# Altium PCB PCB1.PcbDoc
Units mil, origin at the board's own origin, x right, y up, seen from the top; angles counter-clockwise.
Board outline 1695 x 2187 mil, 4 copper layers (SignalTop, Ground, Power, SingalBottom), stack 62.047 mil thick; 65 components, 56 nets, 231 pads, 113 vias.
Unrouted connection lines stored in the file: 4.
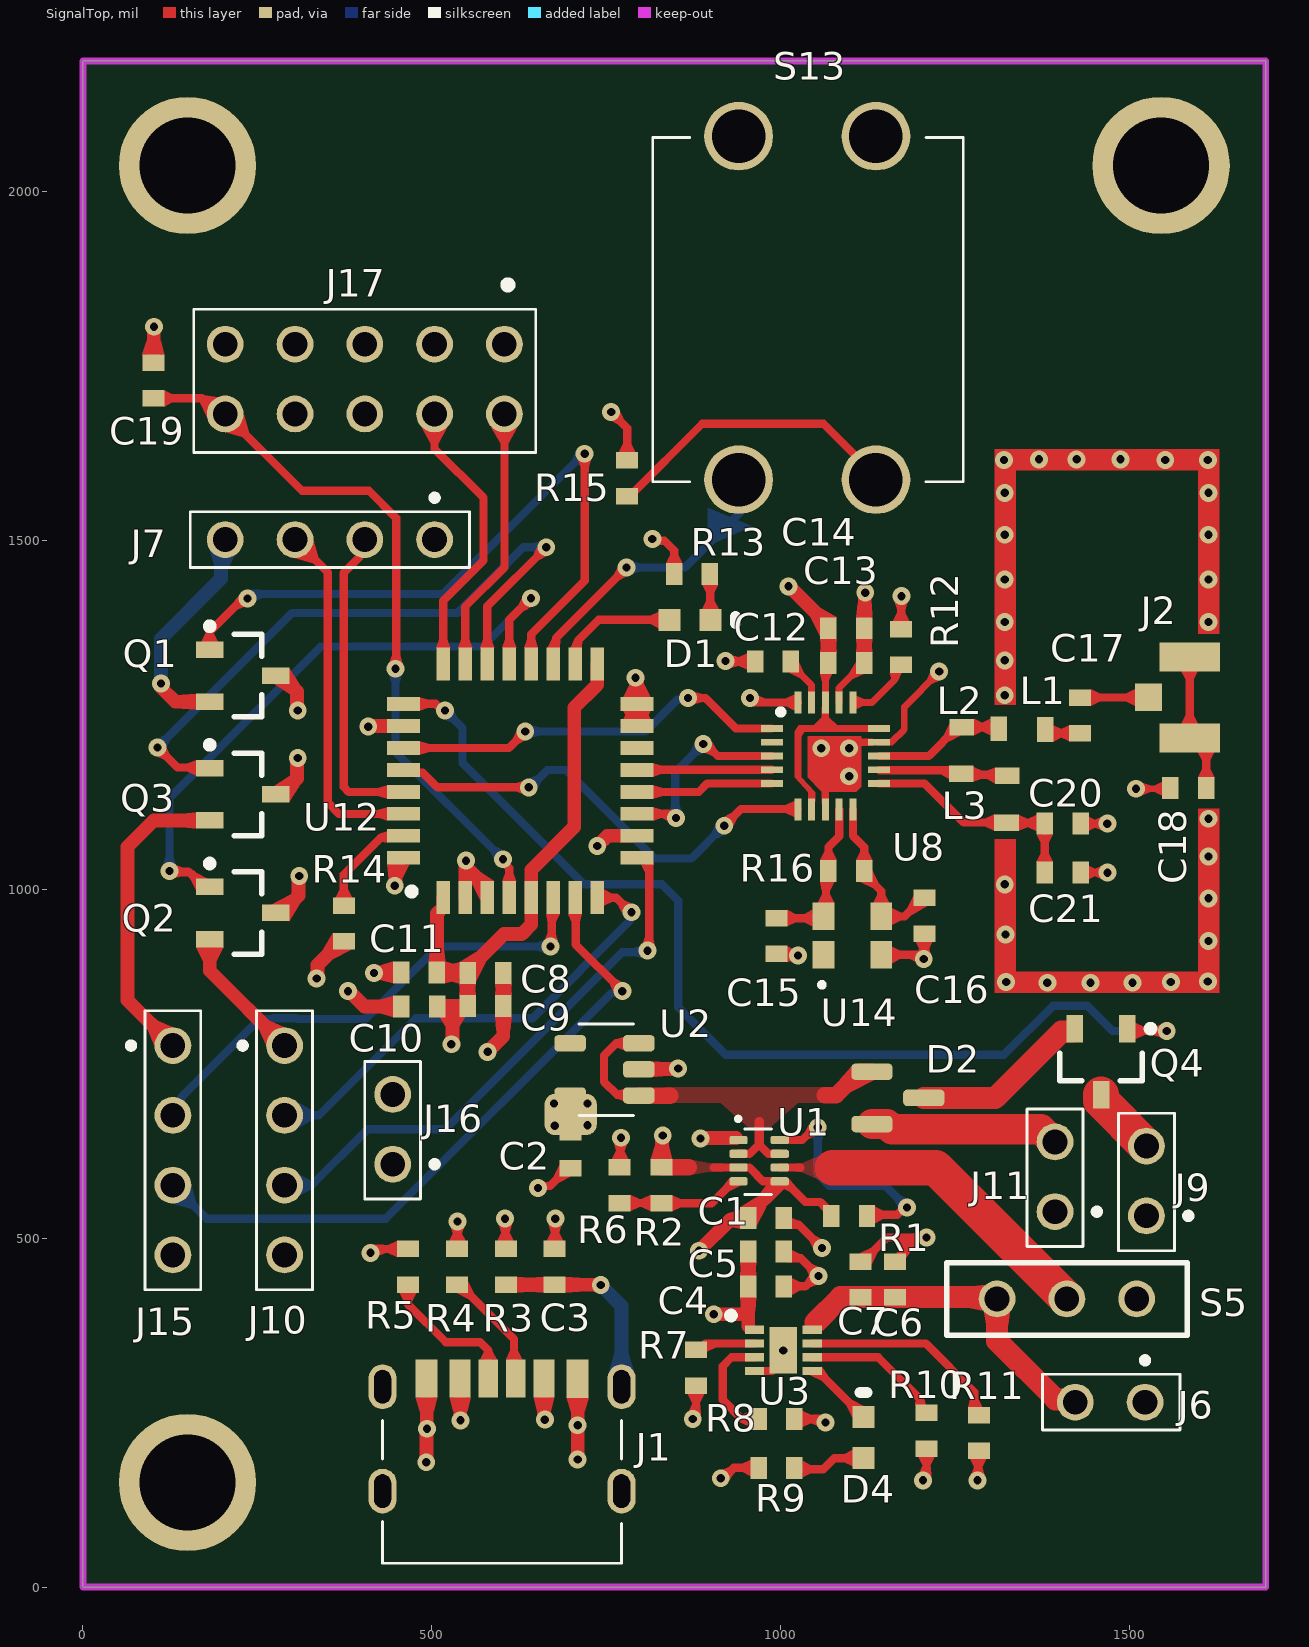
[diagram p0: SignalTop view]
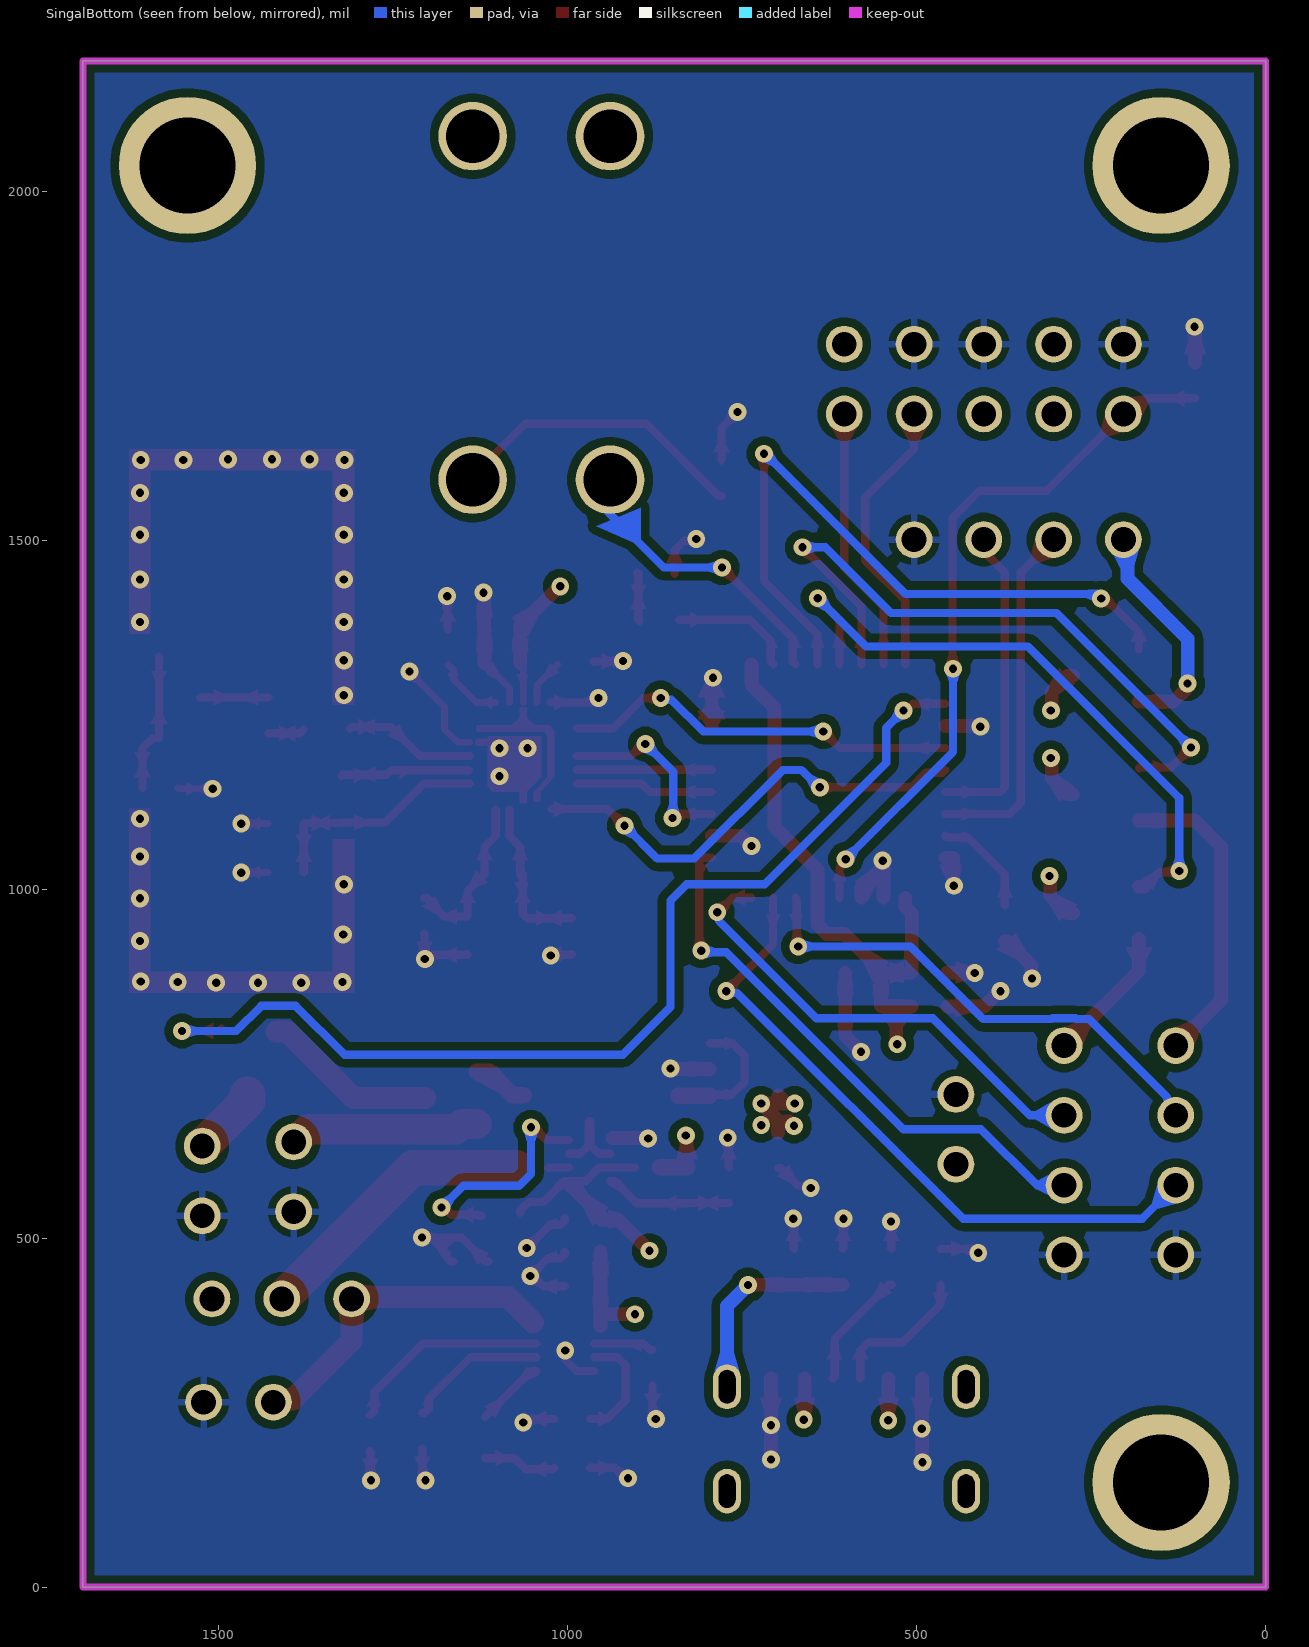
[diagram p1: SingalBottom view, seen from below]
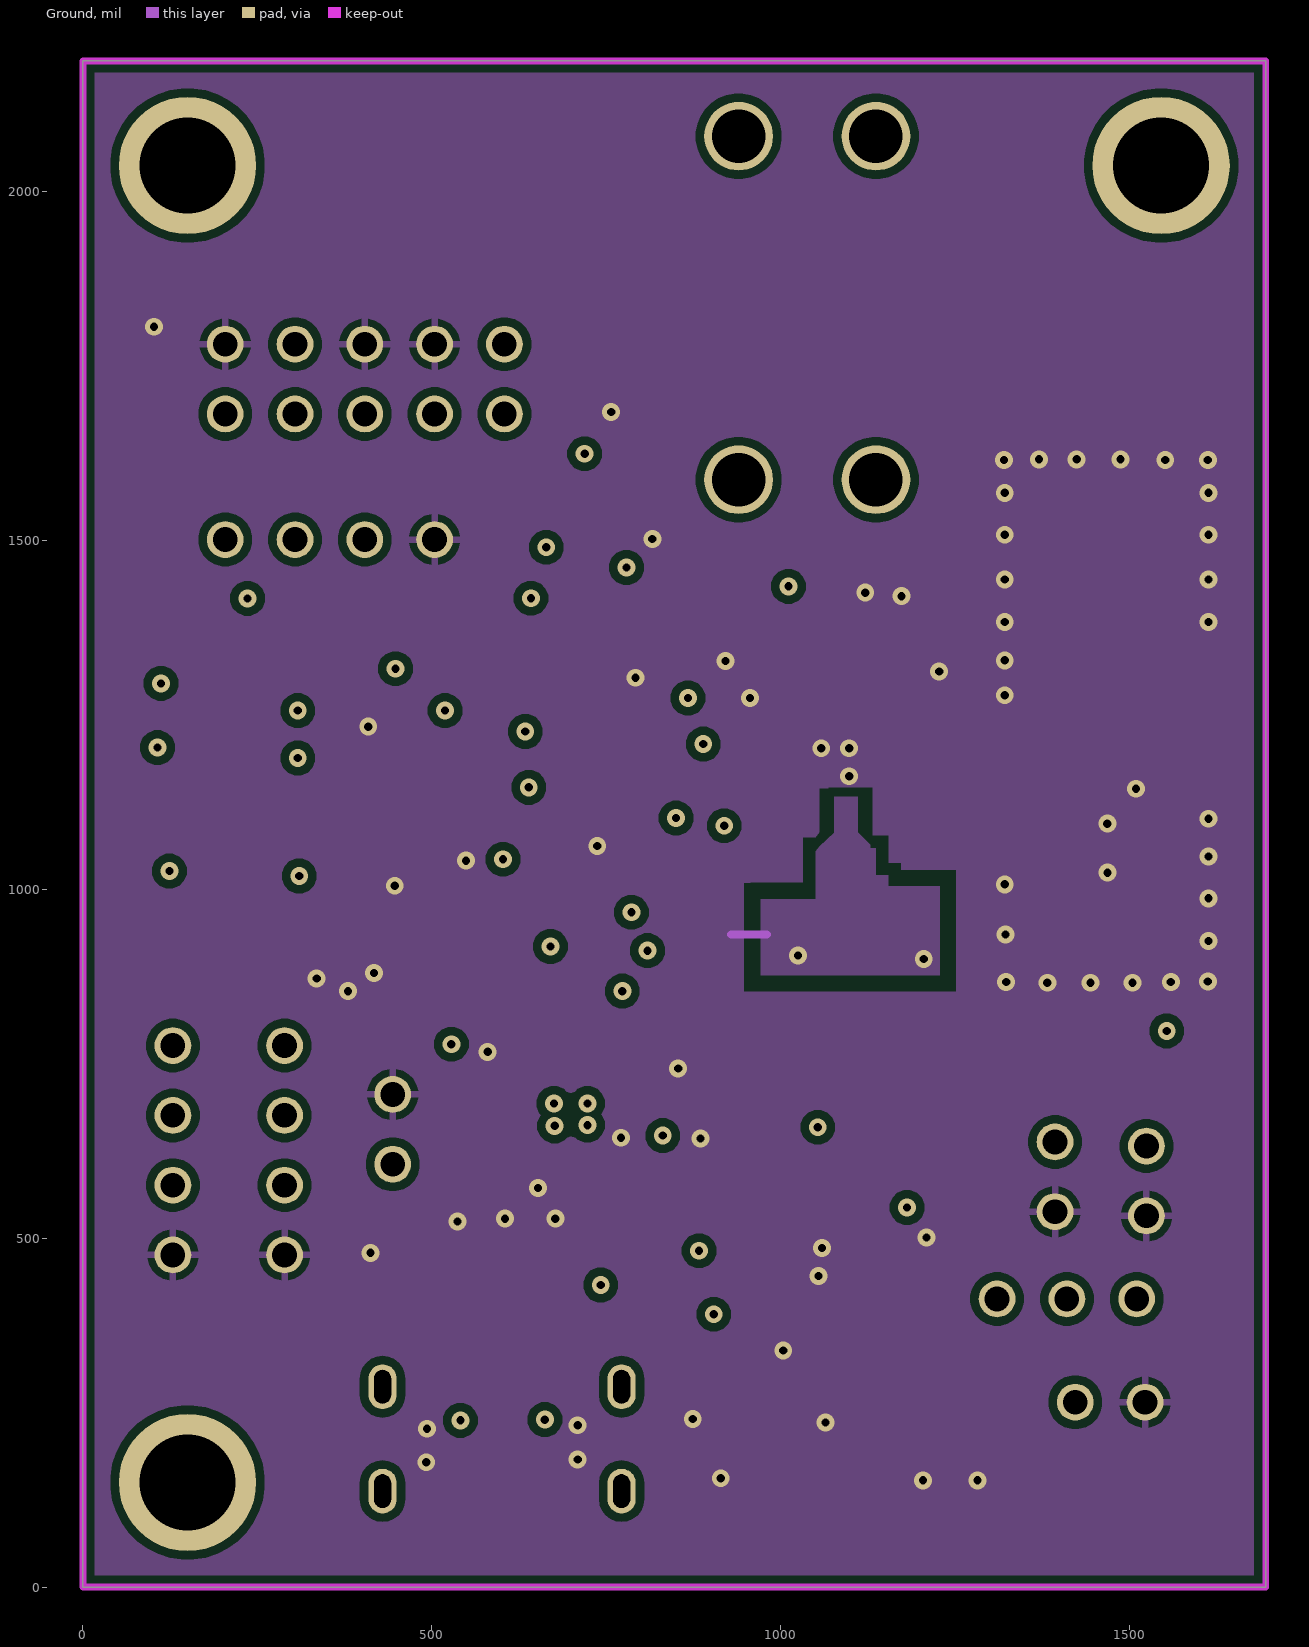
[diagram p2: Ground]
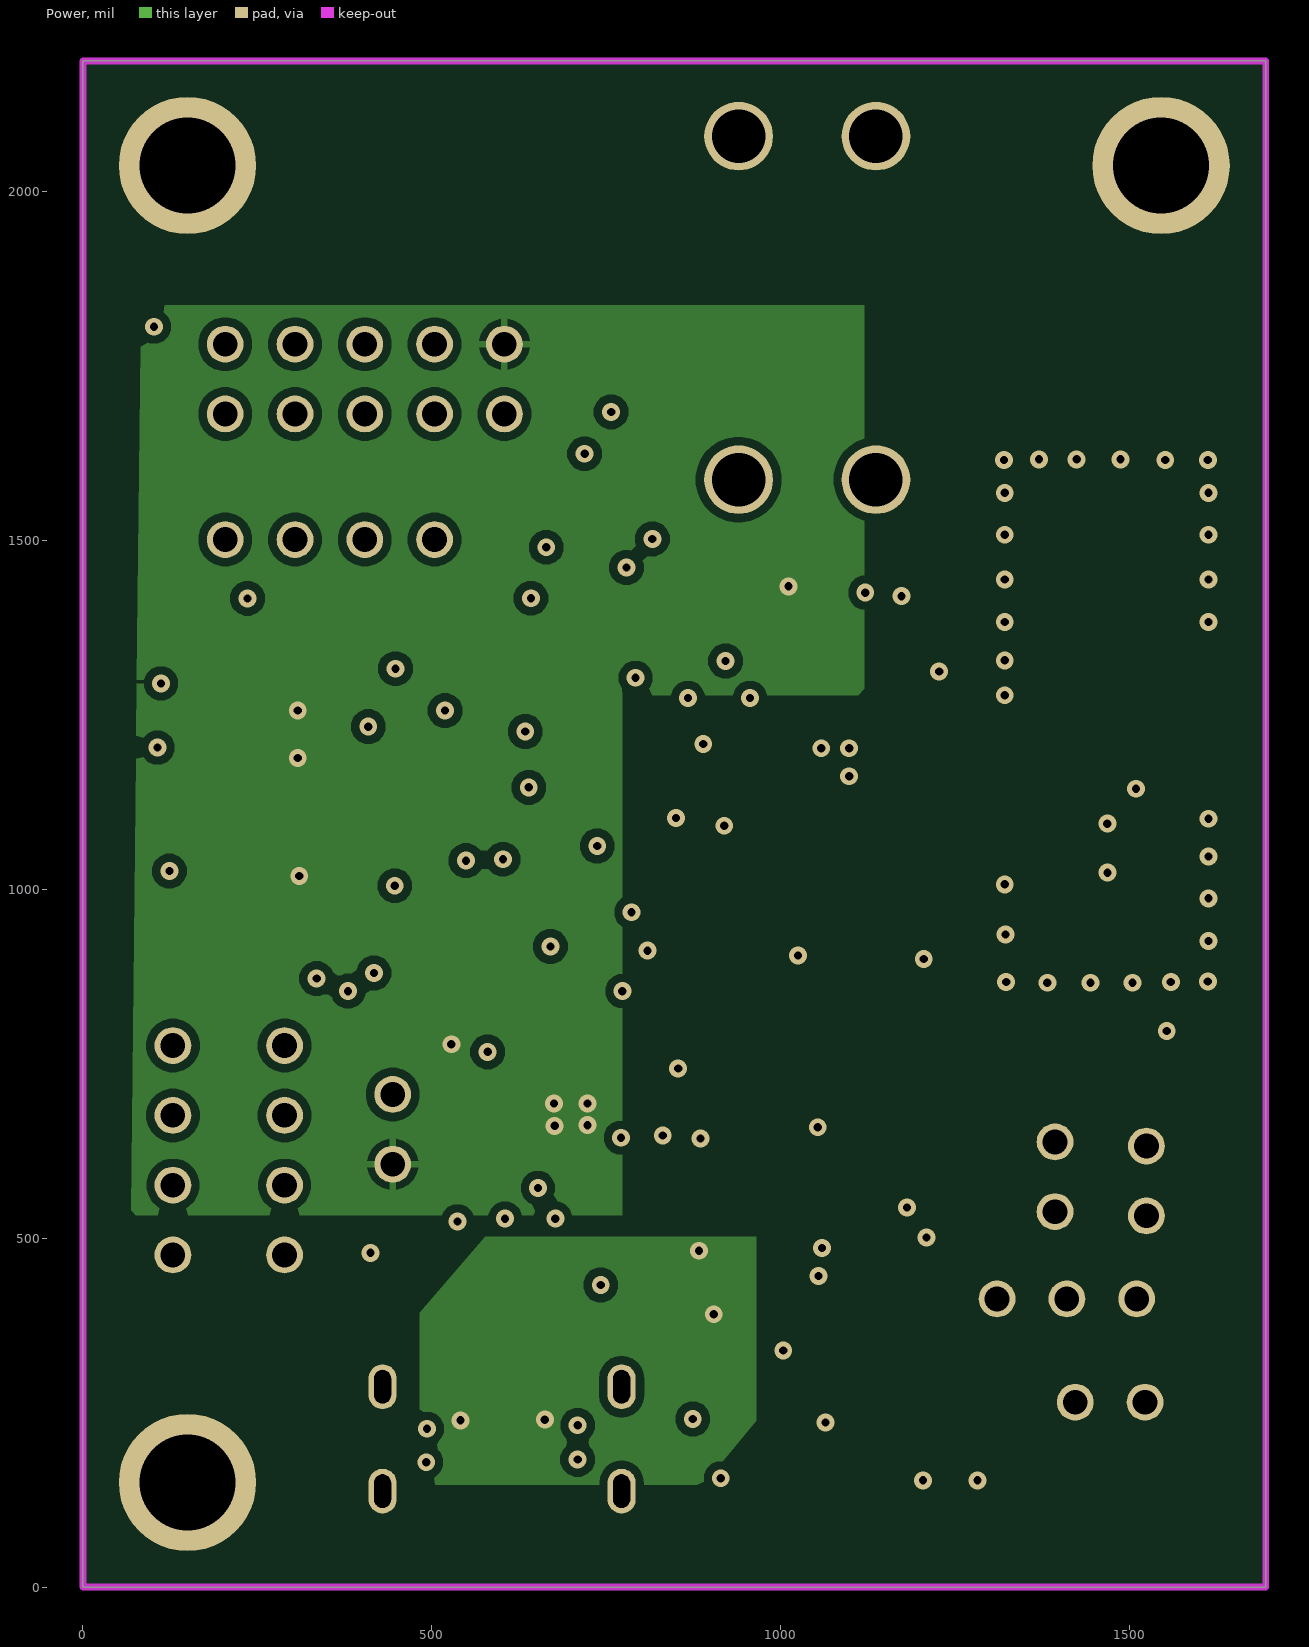
[diagram p3: Power]

## Layer stack, top to bottom
Top Solder: solder mask 1.1811, Solder Resist, Dk 3.8
SignalTop: signal copper 1.378
Dielectric 2: prepreg 7.9921, PP-023, Dk 4.4
Ground: signal copper 1.378
Dielectric 1: core 40.5512, FR-4, Dk 4.6
Power: signal copper 1.378
Dielectric 3: prepreg 7.9921, PP-023, Dk 4.4
SingalBottom: signal copper 1.378
Bottom Solder: solder mask 1.1811, Solder Resist, Dk 3.8

## Board outline
0,0 0,2187 1695,2187 1695,0

## Design rules (kind name [scope] priority, off if disabled: settings)
Clearance Clearance_PadToSilk [IsText vs IsPad] p1: gap=5.91 ignorepadtopadclearanceinfootprint=FALSE
Clearance Clearance_ViaToTrack [IsVia vs IsPAd] p2: gap=7.87 ignorepadtopadclearanceinfootprint=FALSE
Clearance Clearance_HTH [IsVia vs IsVia] p3: gap=0 ignorepadtopadclearanceinfootprint=FALSE
Clearance ClearanceNRF [InComponent('U8')] p4: gap=5.91 ignorepadtopadclearanceinfootprint=FALSE
Clearance ClearanceU1 [(InComponent('U1') AND InNet('GND')) vs InNamedPolygon('NETD2_1_L01_P000')] p5: gap=1.97 ignorepadtopadclearanceinfootprint=TRUE
Clearance ClearanceU1_1 [(InComponent('U1') AND InNet('NetR1_2')) vs InNamedPolygon('NETD2_1_L01_P000')] p6: gap=1.97 ignorepadtopadclearanceinfootprint=TRUE
Clearance ClearanceU1_2 [InNet('NetD2_1') vs InNamedPolygon('NETD2_1_L01_P000')] p7: gap=0.39 ignorepadtopadclearanceinfootprint=TRUE
Clearance Clearance_AC_IN [InNetClass('AC_IN')] p8: gap=78.74 ignorepadtopadclearanceinfootprint=FALSE
Clearance Clearance_OTWORY_MONTAZOWE [InPadClass('OTWORY_MONTAZOWE')] p9: gap=11.81 ignorepadtopadclearanceinfootprint=FALSE
Clearance Clearance_POLYGON [InPolygon] p10: gap=11.81 ignorepadtopadclearanceinfootprint=FALSE
Clearance Clearance_KEEPOUT_ELECTRICAL [OnLayer('Keep-Out Layer')] p11: gap=9.84 ignorepadtopadclearanceinfootprint=FALSE
Clearance [All] p12: gap=7 ignorepadtopadclearanceinfootprint=FALSE
HoleSize [All] p1: absolutevalues=TRUE maxlimit=157.48 minlimit=1 maxpercent=80.000 minpercent=20.000
HoleToHoleClearance [All] p1: gap=5 allowstackedmicrovias=TRUE
MinimumSolderMaskSliver [All] p1: minsoldermaskwidth=3
PolygonConnect PolygonConnect_C61 [InNet('NetC6_1')] p1: thpad.connectstyle=Relief thpad.reliefconductorwidth=10 thpad.reliefentries=4 thpad.polygonreliefangle="90 Angle" thpad.airgapwidth=10 smdpad.connectstyle=Direct smdpad.reliefconductorwidth=10 smdpad.reliefentries=4 smdpad.polygonreliefangle="90 Angle" smdpad.airgapwidth=10 via.connectstyle=Relief via.reliefconductorwidth=10 via.reliefentries=4 via.polygonreliefangle="90 Angle" via.airgapwidth=10
PolygonConnect PolygonNETD21 [(InComponent('U2') AND InNet('NetD2_1')) vs InNamedPolygon('NETD2_1_L01_P000')] p2: thpad.connectstyle=Relief thpad.reliefconductorwidth=10 thpad.reliefentries=4 thpad.polygonreliefangle="90 Angle" thpad.airgapwidth=10 smdpad.connectstyle=Direct smdpad.reliefconductorwidth=10 smdpad.reliefentries=4 smdpad.polygonreliefangle="90 Angle" smdpad.airgapwidth=10 via.connectstyle=Relief via.reliefconductorwidth=10 via.reliefentries=4 via.polygonreliefangle="90 Angle" via.airgapwidth=10
PolygonConnect [All] p3: thpad.connectstyle=Relief thpad.reliefconductorwidth=19.68 thpad.reliefentries=4 thpad.polygonreliefangle="90 Angle" thpad.airgapwidth=10 smdpad.connectstyle=Relief smdpad.reliefconductorwidth=10 smdpad.reliefentries=4 smdpad.polygonreliefangle="90 Angle" smdpad.airgapwidth=10 via.connectstyle=Direct via.reliefconductorwidth=10 via.reliefentries=4 via.polygonreliefangle="90 Angle" via.airgapwidth=10
RoutingVias RoutingVias_POWER [InNetClass('POWER')] p1: holewidth=15.75 width=27.56 viastyle="Through Hole" minholewidth=11.81 minwidth=25.59 maxholewidth=23.62 maxwidth=43.31
RoutingVias [All] p2: holewidth=11.81 width=25.59 viastyle="Through Hole" minholewidth=11.81 minwidth=25.59 maxholewidth=15.75 maxwidth=29.53
SilkToSilkClearance [All] p1: silktosilkclearance=5
SilkToSolderMaskClearance [IsPad] p1: minsilkscreentomaskgap=5 clearancetoexposedcopper=TRUE
SolderMaskExpansion [All] p1: expansion=4 istentingtop=FALSE
UnRoutedNet [All] p1: checkbadconnections=TRUE
Width Width_BATTCHG [All] p1: maxlimit=118.11 minlimit=3.94 preferedwidth=31.5
Width Width_PELT [InNetClass('PELT')] p2: maxlimit=118.11 minlimit=78.74 preferedwidth=98.43
Width Width_POWER [InNetClass('POWER5V')] p3: maxlimit=19.68 minlimit=10 preferedwidth=19.68
Width [All] p4: maxlimit=11.81 minlimit=10 preferedwidth=11.81
24 further rules are at their usual default settings.

## Components (designator, comment, footprint, x,y, rotation, side; value= is the part's Value field where it differs from the comment)
C1 "1u" 0603#1 979,529 r0 top value="10,000 pF"
C2 "1u" 0603#1 699,626 r270 top value="10,000 pF"
C3 "10n" 0603#1 676,459 r90 top value="10,000 pF"
C4 "10n" 0603#1 979,431 r0 top value="10,000 pF"
C5 "1u" 0603#1 979,481 r0 top value="10,000 pF"
C6 "1u" 0603#1 1164,441 r90 top value="10,000 pF"
C7 "10n" 0603#1 1114,441 r90 top value="10,000 pF"
C8 "1u" 0603#1 576.93,880 r0 top value="10,000 pF"
C9 "100n" 0603#1 576.93,833 r0 top value="10,000 pF"
C10 "100n" 0603#1 482.07,832 r180 top value="10,000 pF"
C11 "100n" 0603#1 481.8,880.92 r180 top value="10,000 pF"
C12 "33n" 0603#1 989,1326 r180 top value="10,000 pF"
C13 "1u" 0603#1 1094,1324 r180 top value="10,000 pF"
C14 "100n" 0603#1 1094,1374 r180 top value="10,000 pF"
C15 "22p" 0603#1 994,933 r270 top value="10,000 pF"
C16 "22p" 0603#1 1206,962 r270 top value="10,000 pF"
C17 "1p5" 0603#1 1429,1249 r270 top value="10,000 pF"
C18 "1p" 0603#1 1584,1145 r180 top value="10,000 pF"
C19 "100n" 0603#1 101,1729 r90 top value="10,000 pF"
C20 "2n2" 0603#1 1404,1094 r0 top value="10,000 pF"
C21 "4p7" 0603#1 1404,1024 r0 top value="10,000 pF"
D1 "LED" LIGHT_DIODE 870,1386 r0 top
D2 "DUO_DIODE" DUO_DIODE 1167.83,701.06 r0 top
D4 "LIGHT_DIODE" LIGHT_DIODE 1118.68,214.25 r90 top (schematic designator U4)
J1 "USBC" USB_C 600.68,218.25 r0 top
J2 "UFL_ANTENA" UFL_ANTENA 1556.47,1274.93 r270 top
J6 "BATT_CONN" 2_54X2 1472,265 r180 top (schematic designator U6)
J7 "I2C_CONN" 2_54X4 354,1501 r180 top (schematic designator U7)
J9 "PETLIER_TEC" 2_54X2 1524,582 r90 top (schematic designator U9)
J10 "GPS_CONN" 2_54X4 289,626 r270 top (schematic designator U10)
J11 "PETLIER_TEG" 2_54X2 1393,588 r90 top (schematic designator U11)
J15 "ADC_CONN" 2_54X4 129,626 r270 top (schematic designator U15)
J16 "VCC_CONN" 2_54X2 444,656 r90 top (schematic designator U16)
J17 "SWD2x5" SWD2X5 404,1731 r270 top (schematic designator U17)
L1 "3n9" 0603#2 1345.54,1229.49 r0 top
L2 "8n2" 0603#2 1259,1199 r270 top
L3 "2n7" 0603#2 1324,1129 r270 top
Q1 "PMOS" SOT95P245X112-3N 229,1306 r0 top
Q2 "PMOS" SOT95P245X112-3N 229,966 r0 top
Q3 "PMOS" SOT95P245X112-3N 229,1136 r0 top
Q4 "PMOS" SOT95P245X112-3N 1459,753 r270 top
R1 "10k" 0603#1 1098,532 r0 top
R2 "1k" 0603#1 829,576 r90 top
R3 "1M" 0603#1 606,459 r270 top
R4 "5.1k" 0603#1 536,459 r270 top
R5 "5.1k" 0603#1 466,459 r270 top
R6 "2k" 0603#1 769,576 r270 top
R7 "600" 0603#1 878.68,314.25 r90 top
R8 "10k" 0603#1 994,241 r180 top
R9 "10k" 0603#1 994,171 r0 top
R10 "15k" 0603#1 1208.68,224.25 r90 top
R11 "15k" 0603#1 1284,221 r90 top
R12 "22k" 0603#1 1172,1347 r270 top
R13 "2k2" 0603#1 873,1452 r0 top
R14 "10k" 0603#1 374,951 r270 top
R15 "1M" 0603#1 780,1589 r90 top
R16 "22k" 0603#1 1094,1026 r0 top
S5 "SWITCH3PIN" SWITCH 1410,413 r0 top (schematic designator U5)
S13 "FSM100" FSM100 1038,1833 r90 top (schematic designator U13)
U1 "TPS2117" TPS2117 969,611 r0 top
U2 "ADP160" ADP160 747.47,741.84 r180 top
U3 "BQ25172DSGR" BQ25172 1003.68,339.25 r0 top
U8 "nRF24L01P" NRF24L01P 1064,1191 r0 top
U12 "STM32L071KBT6" STM32L0 626.68,1155.25 r0 top
U14 "OSCILATOR" OSCILATOR 1013,937 r0 top

## Footprints (in the part's own frame and the unit in brackets; to place one, negate y for a bottom-side part, rotate by r counter-clockwise, add the part's x,y. Pads: shape width x height; smd on the part's side, far side on the other; paste and mask are expansions set on the pad)
2_54X2 [mm]
  round 1.34 hole 0.9: 1(-1.27,0) 2(1.27,0)
  silkscreen extent -2.54,-1.62 2.47,1.02
2_54X4 [mm]
  round 1.34 hole 0.9: 1(-3.81,0) 2(-1.27,0) 3(1.27,0) 4(3.81,0)
  silkscreen extent -5.08,-1.62 5.08,1.02
0603#1 [mm] "Chip Capacitor, 2-Leads, Body 1,00x0,50mm, IPC Medium Density"
  rect 0.6x0.8 smd: 1(-0.65,0) 2(0.65,0)
  body extent -0.85,-0.45 0.85,0.45, height 0.55
0603#2 [mm]
  rect 0.6x0.9 smd: 1(-0.85,0.012) 2(0.85,-0.012)
ADP160 [mm]
  rrect50% 1.15x0.6 smd: 1(-1.25,0.95) 2(-1.25,0) 3(-1.25,-0.95) 4(1.25,0.95) 5(1.25,-0.95)
  silkscreen extent -1.05,-1.65 0.92,1.68
BQ25172 [mm]
  rect 0.7x0.3 smd: 1(-1.05,0.75) 2(-1.05,0.25) 3(-1.05,-0.25) 4(-1.05,-0.75) 5(1.05,-0.75) 6(1.05,-0.25) 7(1.05,0.25) 8(1.05,0.75)
  rect 1x1.7 smd: 4(0,0)
  silkscreen extent -2.03,1.15 -1.78,1.39
DUO_DIODE [mm]
  rrect50% 1.5x0.6 smd: 1(-0.944,0.953) 2(-0.944,-0.953) 3(0.944,-0.002)
FSM100 [mm]
  round 2.5 hole 1.95: 1(-6.25,2.5) 2(6.25,2.5) 3(-6.25,-2.5) 4(6.25,-2.5)
  silkscreen extent -6.32,-5.68 6.2,5.63
LIGHT_DIODE [mm]
  rect 0.8x0.8 smd: 1(-0.75,0) 2(0.75,0)
  silkscreen extent 1.65,-0.13 1.65,0.13, body extent -0.8,-0.4 0.8,0.4, height 0.9
NRF24L01P [mm]
  rect 0.8x0.25 smd: 1(-1.95,1) 2(-1.95,0.5) 3(-1.95,0) 4(-1.95,-0.5) 5(-1.95,-1) 11(1.95,-1) 12(1.95,-0.5) 13(1.95,0) 14(1.95,0.5) 15(1.95,1)
  rect 0.25x0.8 smd: 6(-1,-1.95) 7(-0.5,-1.95) 8(0,-1.95) 9(0.5,-1.95) 10(1,-1.95) 16(1,1.95) 17(0.5,1.95) 18(0,1.95) 19(-0.5,1.95) 20(-1,1.95)
  SignalTop region: -0.125,-1.725 0.125,-1.725 0.125,-1.55 0.125,-1.5 0.125,-1.125 -0.125,-1.275
  SignalTop region: -0.875,0.7 -0.775,0.875 -0.775,1.125 -0.975,1.125 -1.125,0.9 -1.125,0.7
  SignalTop region: 1.3,0.725 1.3,-1.125 1.125,-1.3 -0.125,-1.3 -0.65,-0.775 -0.65,-0.75 -0.65,0.725
  SignalTop region: -0.625,-1.325 -0.375,-1.325 -0.875,-0.775 -1.125,-0.775
  SignalTop region: -1.125,-0.775 -1.125,0.7 -0.875,0.7 -0.875,-0.775
  SignalTop region: -0.625,-1.325 -0.625,-1.675 -0.375,-1.675 -0.375,-1.325
  SignalTop region: -0.125,1.1 -0.125,1.775 0.125,1.775 0.125,1.1
  SignalTop region: 0.375,1.1 0.45,1.1 0.125,1.4 0.125,1.1
  SignalTop region: -0.375,1.1 -0.45,1.1 -0.125,1.4 -0.125,1.1
  SignalTop region: 1.7,0.875 -0.775,0.875 -0.775,1.125 1.7,1.125
  SignalTop region: 1.725,0.375 1.725,0.625 1.55,0.625 1.5,0.625 1.125,0.625 1.275,0.375
  SignalTop lines w0.25: 0,1.95 0,1.95
  silkscreen extent -1.68,1.54 -1.57,1.66
OSCILATOR [mil]
  rect 31.5x39.37 smd: 1(48,-31) 2(131,-31) 3(131,24) 4(48,24)
  silkscreen extent 45,-75 47,-73
SOT95P245X112-3N [mm] "SOT23, 3-Leads, Body 2,90x2,45mm, Pitch 0,95mm, IPC Medium Density"
  rect 1x0.6 smd: 1(-1.2,0.95) 2(-1.2,-0.95) 3(1.2,0)
  silkscreen extent -1.32,-1.5 0.7,1.92, body extent -0.7,-1.5 0.7,1.5, height 1.12
STM32L0 [mm]
  rect 0.5x1.2 smd: 1(-2.8,-4.25) 2(-2,-4.25) 3(-1.2,-4.25) 4(-0.4,-4.25) 5(0.4,-4.25) 6(1.2,-4.25) 7(2,-4.25) 8(2.8,-4.25) 17(2.8,4.25) 18(2,4.25) 19(1.2,4.25) 20(0.4,4.25) 21(-0.4,4.25) 22(-1.2,4.25) 23(-2,4.25) 24(-2.8,4.25)
  rect 1.2x0.5 smd: 9(4.25,-2.8) 10(4.25,-2) 11(4.25,-1.2) 12(4.25,-0.4) 13(4.25,0.4) 14(4.25,1.2) 15(4.25,2) 16(4.25,2.8) 25(-4.25,2.8) 26(-4.25,2) 27(-4.25,1.2) 28(-4.25,0.4) 29(-4.25,-0.4) 30(-4.25,-1.2) 31(-4.25,-2) 32(-4.25,-2.8)
  silkscreen extent -4.06,-4.13 -3.84,-3.92
SWD2X5 [mm]
  round 1.34 hole 0.9: 1(-1.27,5.08) 2(1.27,5.08) 3(-1.27,2.54) 4(1.27,2.54) 5(-1.27,0) 6(1.27,0) 7(-1.27,-2.54) 8(1.27,-2.54) 9(-1.27,-5.08) 10(1.27,-5.08)
  silkscreen extent -3.56,-6.22 2.67,6.22
SWITCH [mm]
  round 1.34 hole 0.9: 1(-2.54,0) 2(0,0) 3(2.54,0)
  silkscreen extent -4.38,-1.33 4.38,1.33
TPS2117 [mm]
  rrect50% 0.67x0.3 smd mask+0.051: 1(-0.75,0.75) 2(-0.75,0.25) 3(-0.75,-0.25) 4(-0.75,-0.75) 5(0.75,0.75) 6(0.75,0.25) 7(0.75,-0.25) 8(0.75,-0.75)
  silkscreen extent -0.84,-1.22 0.45,1.6
UFL_ANTENA [mm]
  rect 1x1 smd: 1(0,-0.75)
  rect 1.05x2.2 smd: 2(-1.475,0.75) 2(1.475,0.75)
USB_C [mm]
  rect 0.7x1.4 smd: A5(-0.5,2.05) B5(0.5,2.05)
  rect 0.76x1.4 smd: A9(1.525,2.05) B9(-1.525,2.05)
  rect 0.8x1.4 smd: A12(2.752,2.049) B12(-2.752,2.05)
  oval 1.03x1.63 hole 0.62 slot 1.22 at 90 deg: SHIELD(-4.35,-2.05) SHIELD(-4.35,1.75) SHIELD(4.35,-2.05) SHIELD(4.35,1.75)
  silkscreen extent -4.35,-4.67 4.35,0.53

## Part data
C1 C2 C3 C4 C5 C6 C7 C8 C9 C10 C11 C12 C13 C14 C15 C16 C17 C18 C19 C20 C21: library part CAP10nF, "CAP CER 10000PF 10V X7R 0402", Capacitance="10,000 pF", Manufacturer=Kemet, Manufacturer Part Number=C0402C103M8RACTU, Package=C0402-BB, Temperature="-55°C to +125°C", Temperature Characteristic=X7R, Temperature Coefficient=15%, Temperature Range High=+125°C, Temperature Range Low=-55°C, Tolerance=0.2, Voltage Rating="10 V", Automotive=No, Category=Cap, ComponentLink2Description=Datasheet, ComponentLink2URL=https://content.kemet.com/datasheets/KEM_C1002_X7R_SMD.pdf, Device Class L1="Passive Components", Device Class L2=Capacitors, Device Class L3="Ceramic Capacitors", Digikey Description="CAP CER 10000PF 10V X7R 0402", Height=0.55mm, Ipc Land Pattern Name=CAPC10050X50, Lead Free=Yes, Material=Ceramic, Mouser Description="Multilayer Ceramic Capacitors MLCC - SMD/SMT 10volts 10000pF X7R 20%", Octopart=https://octopart.com/c0402c103m8ractu-kemet-12595671, RoHS=TRUE
D1: library part LIGHT_DIODE
J6 J9 J11 J16: library part 2_54x2
J7 J10 J15: library part 2_54x4
L1 L2 L3: library part INDUCTOR
R1 R2 R3 R4 R5 R6 R7 R8 R9 R10 R11 R12 R13 R14 R15 R16: library part REZYSTOR

## Free pads (board coordinates)
  rrect50% 74.8x59.06 smd: 1(699,677.35)
  round 196.85 hole 137.8: 3.5/5(150,150) 3.5/5(150,2037) 3.5/5(1545,2037)

## Via types
v1: diameter 25.59, hole 11.81, SignalTop to SingalBottom, 113 vias

## Nets (pads, with @x,y where several pads share a name; then routed paths per layer and width w, separated by ;. In a path a pad name is that pad's centre, name@x,y a point inside that pad or via, vN(x,y) a via of type N, cw(c..) or ccw(c..) an arc to the next point about the centre after c; other vN are vias at no path point)
3V3BUS: C2.1 C8.1 C9.1 C10.1 C11.1 C13.2 C14.2 J16.1 J17.1 pad.1 Q1.3 Q2.3 Q3.3 U2.4 U8.7 U8.15 U8.18 U12.1 U12.5 U12.17 | length 1371.2
  SignalTop w9.84: U8.18 1064,1319.59 C13.2
  SignalTop w19.68: Q2.3 284.12,966 308.87,990.75 308.87,1017.87 v1(310,1019) ; Q3.3 284.12,1136 306.87,1158.75 306.87,1186.87 v1(308,1188) ; Q1.3 284.12,1306 306.87,1283.25 306.87,1257.13 v1(308,1256) ; C10.1 508.16,832.5 529.5,832.5 ; U12.1 516.44,974.15 507.39,965.1 C11.1 507.86,880.46 550.88,880.46 C8.1 C9.1 550.84,832.5 529.5,832.5 ; v1(528,778) 529.13,779.13 529.13,783.31 529.5,783.68 529.5,832.5 ; C8.1@553.31,885.91 603.4,936 629,936 642.43,949.43 U12.5 642.43,1027.51 704,1089.09 704,1260 736.91,1292.91 U12.17 ; v1(675,693) 683.35,693 683.48,692.87 683.61,693 v1(723,693) 699,669 C2.1 ; v1(676,661) 682.13,667.13 pad.1@688.78,667.13 ; pad.1@686.45,692.63 U2.4 698.63,704.07 pad.1@698.63,695.63 ; v1(1011,1434) 1012.35,1434 1068.41,1377.94 C14.2 C13.2
  other v1: 723,662
5VBUS: C1.1 C4.1 C5.1 J1.A9 J1.B9 R1.1 R2.2 U1.3 U1.8 U3.1 | length 704
  SignalTop w11.81: 903.84,601.16 U1.3 955.4,601.16 965.57,590.99 965.57,590.43 974.53,581.47 U1.8@994,581.47 ; U1.8 1005.81,581.47 1035.28,552 1056.35,552 1068.41,539.94 R1.1@1068.41,536
  SignalTop w19.68: J1.B9 540.82,298.78 540.82,239.18 v1(541,239) ; J1.A9 660.72,242.88 662,241.6 v1(662,240) ; R2.2 830,602.59 830,646 v1(831,647) ; v1(883,482) 927.28,526.28 951.44,526.28 953.41,528.24 953.41,532.94 U1.8@998.24,577.76 ; v1(904,391) 948.41,391 ; U3.1@953.41,374 953.41,386 C4.1 C5.1
  SignalTop w23.62: R2.2 868.41,601.59
CC1: J1.A5 R5.2 | length 210.8
  SignalTop w11.81: R5.2 466,405 520,351 569,351 581,339 J1.A5
CC2: J1.B5 R4.2 | length 171.7
  SignalTop w11.81: R4.2 539.94,433.41 617.7,355.65 617.7,301.62 J1.B5
GND: C1.2 C2.2 C3.2 C4.2 C5.2 C6.2 C7.2 C8.2 C9.2 C10.2 C11.2 C12.2 C13.1 C14.1 C15.2 C16.2 C18.2 C19.2 C20.2 C21.2 J1.A12 J1.B12 J6.1 J7.1 J9.1 J10.4 J11.1 J15.4 J16.2 J17.3 J17.5 J17.9 R3.1 R4.1 R5.1 R6.1 R7.1 R8.1 R9.1 R10.1 R11.1 R12.1 R13.1 R14.2 R15.2 U1.1 U2.2 U3.4 U8.8 U8.14 U8.17 U8.20 U12.2 U12.3 U12.10 U12.14 U12.15 U12.16 U12.26 U12.32 U14.2 | length 2927.4
  SignalTop w9.84: U8.17 1083.68,1288.09 1108.76,1313.17 1112.7,1313.17 C13.1@1119.59,1320.06 ; U8.14 1158.46,1210.68 1177,1229.23 1177,1261 v1@1227,1311 ; C21.2 1467.79,1024 v1(1468.02,1023.77) ; C20.2 v1(1468,1094) ; v1(1509,1144) 1557.41,1144 C18.2
  SignalTop w11.81: v1(412,479) 415.73,479 421.32,484.59 R5.1 ; R4.1 536.5,485.09 536.5,523.5 v1(537,524) ; v1(605,528) 605.5,527.5 605.5,485.09 R3.1 ; v1(652,572) 654.64,574.64 669.29,574.64 695.06,600.41 C2.2 ; C3.2 676.5,485.09 676.5,527.5 v1(677,528) ; v1(757,1684) 780,1661 R15.2 ; R6.1 770,602.59 770,643 v1(771,644) ; v1(816,1502) 818.64,1499.36 833.51,1499.36 847.41,1485.46 R13.1 ; v1(874,241) 874,244.73 878.68,249.41 R7.1 ; v1(914,156) 917.73,156 932.73,171 R9.1 ; v1(921,1327) 921.5,1326.5 962.91,1326.5 C12.2 ; v1(956,1274) 959.73,1274 965.96,1267.77 U8.20 ; U3.4@962.34,309.72 987.93,309.72 U3.4@1003.68,325.47 ; C15.2 995.2,906.2 1023.38,906.2 v1(1024.58,905) ; C4.2 1035.27,431 1050.27,446 v1(1054,446) 1028.84,471.16 1010.5,471.16 1004.59,477.06 C5.2 ; C1.2 1004.59,525.06 1010.5,519.16 1025.84,519.16 v1(1059,486) ; R8.1 1055.27,241 1060.27,236 v1(1064,236) ; C7.2 1117.94,466.59 1152.35,501 1180.67,501 ; U14.2@1145.41,907.41 U14.2 1195.27,906 1201.27,900 v1(1205,900) 1205.5,900.5 1205.5,935.91 C16.2 ; C6.2 1167.94,466.59 1173.84,472.5 1173.84,476.43 1180.67,483.26 1180.67,501 ; R12.1 1172.5,1373.09 1172.5,1419.5 v1(1173,1420) ; v1(1204,153) 1204,156.73 1208.68,161.41 R10.1 ; v1(1209,501) 1180.67,501 ; v1@1227,1311 v1(1227,1312) ; v1(1282,153) 1283,154 1283,194.41 R11.1
  SignalTop w19.68: C19.2 101.5,1755.09 101.5,1805.5 v1(102,1806) ; v1(335,872) 336.13,873.13 336.13,891.48 370.06,925.41 R14.2 ; v1(380,854) 381.6,854 403.6,832 C10.2 ; v1(409,1233) 409.99,1233.99 U12.26 ; v1(417,880) 417.46,880.46 455.75,880.46 C11.2 ; v1(447,1005) 448.13,1006.13 448.13,1045.02 U12.32 ; v1(492,179) 492.5,179.5 492.5,226.5 v1(493,227) 492.67,227.33 492.67,298.63 J1.B12 ; U12.2 547.94,1039.94 v1(549,1041) ; 554.13,1027.01 579.43,1001.71 U12.3 ; v1(580,767) 602.52,789.52 C9.2 C8.2 ; v1(709,183) v1(709.02,232) J1.A12 ; v1(737,1062) 751.51,1076.51 U12.10 ; v1(792,1303) 792,1301.4 794,1299.4 U12.16 U12.15 ; U2.2 797.26,742.42 852.42,742.42 v1(853,743) ; v1(885,643) 885.59,643.59 U1.1@936.13,643.59 ; C13.1 C14.1 1120.3,1374.7 1120.3,1424.3 v1(1121,1425)
  Ground w11.81: 929,935 980,935
  other v1: 1003.68,339.25 1382,866 1444,866 1504,866 1323,867 1559,867 1612,868 1613,926 1322,935 1613,987 1321,1007 1613,1047 1613,1101 1098,1162 1058,1202 1098,1202 1321,1278 1321,1328 1321,1383 1613,1383 1321,1444 1613,1444 1321,1508 1613,1508 1321,1568 1613,1568 1320,1615 1551,1615 1612,1615 1370,1616 1424,1616 1487,1616
NetC6_1: C6.1 C7.1 J6.2 S5.1 U3.8 | length 480.7
  SignalTop w31.5: 1049.75,379.25 1085.9,415.41 C7.1@1110.06,415.41 ; C7.1 C6.1 1307.59,415.41 S5.1 1310,353 1393.93,269.07 1417.93,269.07 J6.2
NetC12_1: C12.1 U8.19 | length 66.6
  SignalTop w9.84: C12.1@1014.59,1322.06 1044.32,1292.34 U8.19
NetC15_1: C15.1 R16.1 U8.9 U14.4 | length 230.6
  SignalTop w11.81: C15.1 1058.59,958.59 U14.4 ; U14.4@1064.7,964.7 R16.1@1064.7,1017.3 ; R16.1@1064.7,1022.3 R16.1@1064.7,1017.3 ; U8.9 1083.68,1076.32 1084,1076 1068.41,1060.41 1068.41,1021 R16.1@1064.7,1017.3
NetC16_1: C16.1 R16.2 U8.10 U14.3 | length 244.9
  SignalTop w11.81: U8.10 1103.37,1076.63 1119.59,1060.41 R16.2 1119.59,1021 1120.65,1021 1144,997.65 U14.3 1177.46,961 1196.16,979.69 1196.16,981.68 1202.06,987.59 C16.1
NetC17_1: C17.1 J2.1 | length 98.1
  SignalTop w11.81: C17.1 1526.61,1274.59 J2.1
NetC17_2: C17.2 L1.2 | length 52.3
  SignalTop w11.81: L1.2 1384.59,1223.41 C17.2
NetC18_1: C18.1 J2.2 | length 202.9
  SignalTop w11.81: J2.2@1586,1333 1586,1216.86 1594.83,1216.86 1609.59,1202.09 C18.1
NetC19_1: C19.1 J17.10 U12.4 | length 1031
  SignalTop w11.81: C19.1 170.51,1703.41 192.92,1681 J17.10 314,1571 410,1571 449,1532 449,1317 v1(448,1316) ; v1(602,1043) 602,1039.27 610.93,1030.34 U12.4
  SingalBottom w11.81: v1(448,1316) 448,1197 v1(602,1043)
NetC20_1: C20.1 C21.1 L3.2 U8.11 | length 331.5
  SignalTop w11.81: U8.11 1206.06,1151.63 1262.16,1095.54 L3.2 1324.28,1094.77 1377.64,1094.77 C20.1 C21.1
NetD1_1: D1.1 U12.18 | length 178.8
  SignalTop w11.81: U12.18 709.35,1326.51 709.35,1356.35 739,1386 D1.1
NetD1_2: D1.2 R13.2 | length 72
  SignalTop w11.81: D1.2@897.56,1384.03 D1.2 899.06,1386.47 899.06,1451.53 R13.2 R13.2@900.56,1453.97
NetD2_1: D2.1 U1.2 U1.6 U2.1 U2.3 | length 382.5
  SignalTop w11.81: U2.1 795.53,705.59 765.41,705.59 746.89,724.11 746.89,761.89 764.25,779.25 U2.3 ; U1.2 955.4,620.84 969,634.44 982.6,620.84 U1.6
  SignalTop w13.78: 969,634.44 969,667
  SignalTop w23.62: U2.1 842,704.44 ; 1063,705 1079.39,705 1112.95,738.56 D2.1
NetD2_2: D2.2 J11.2 | length 272.9
  SignalTop w43.31: D2.2 1151.85,663.56 1159.4,656 1372.44,656 1390.44,638 J11.2
NetD2_3: D2.3 Q4.2 | length 252.1
  SignalTop w31.5: D2.3 1307.16,701 1402.46,796.31 Q4.2@1417.66,796.31
NetL1_1: L1.1 L2.1 U8.13 | length 189.5
  SignalTop w11.81: U8.13 1212.12,1191 1253.59,1232.46 L2.1 1309.59,1232.46 L1.1
NetL2_2: L2.2 L3.1 U8.12 | length 186.2
  SignalTop w11.81: U8.12@1141.65,1170.44 1253.6,1170.44 L2.2 1260.04,1164 1322.96,1164 L3.1
NetQ1_1: Q1.1 U12.20 | length 1001.5
  SignalTop w11.81: Q1.1 181.76,1368.76 229.78,1416.78 v1(235.86,1416.78) ; U12.20 642.43,1365.36 719,1441.94 v1(719,1624)
  SingalBottom w11.81: v1(235.86,1416.78) 239.59,1416.78 245.82,1423 516,1423 717,1624 v1(719,1624)
NetQ1_2: J7.4 Q1.2 | length 328.2
  SignalTop w19.68: v1(112,1295) 113.13,1293.87 113.13,1288.01 132.54,1268.6 Q1.2
  SingalBottom w19.68: v1(112,1295) 112,1359 198.09,1445.09 198.09,1495.09 J7.4
NetQ2_1: Q2.1 U12.21 | length 915.9
  SignalTop w11.81: v1@125.13,1024.87 152.41,1024.87 Q2.1@173.88,1003.4 ; U12.21 610.93,1385.93 v1(642,1417)
  SignalTop w19.68: v1(124,1026) v1@125.13,1024.87 ; Q2.1@173.88,1003.4 Q2.1
  SingalBottom w11.81: v1(124,1026) 124,1131 341,1348 573,1348 v1(642,1417)
NetQ2_2: J10.1 Q2.2 | length 197
  SignalTop w19.68: Q2.2 181.76,883.24 J10.1
NetQ3_1: Q3.1 U12.22 | length 965.3
  SignalTop w11.81: v1(107,1203) 135.63,1174.37 180.78,1174.37 Q3.1 ; U12.22 579.43,1405.43 v1(664,1490)
  SingalBottom w11.81: v1(107,1203) 300,1396 537,1396 631,1490 v1(664,1490)
NetQ3_2: J15.1 Q3.2 | length 445.3
  SignalTop w19.68: J15.1 64,841 64,1061 101.6,1098.6 Q3.2
NetQ4_1: Q4.1 U12.25 | length 1522.8
  SignalTop w11.81: U12.25 459.61,1265.74 505.53,1265.74 515.27,1256 v1(519,1256) ; Q4.1 1499.65,797 v1(1553,797)
  SingalBottom w11.81: v1(519,1256) 544,1231 544,1181 718,1007 830,1007 853,984 853,831 921,763 1320,763 1390,833 1439.27,833 1475.27,797 v1(1553,797)
NetQ4_3: J9.2 Q4.3 | length 100.7
  SignalTop w51.18: Q4.3 1459,697 J9.2
NetR1_2: R1.2 U1.5 | length 339.4
  SignalTop w11.81: U1.5 1030.8,640.53 1049.27,659 v1(1053,659) ; R1.2 1128,532 1129.5,533.5 1166.77,533.5 1177.27,544 v1(1181,544)
  SingalBottom w11.81: v1(1053,659) 1053,592 1070,575 1150,575 v1(1181,544)
NetR2_1: R2.1 R6.2 U1.4 | length 183.1
  SignalTop w11.81: R6.2 R2.1 ; R2.1@829.44,549.97 900.68,549.97 932.19,581.47 U1.4
NetR7_2: R7.2 U3.2 | length 87.5
  SignalTop w11.81: R7.2 882.62,339.84 891.87,349.09 U3.2
NetR8_2: R8.2 U3.3 | length 162.1
  SignalTop w11.81: U3.3 929.4,329.4 917,317 917,268 944,241 R8.2
NetR9_2: D4.1 R9.2 | length 106.4
  SignalTop w11.81: R9.2 1021.59,169 1061,169 1076.72,184.72 D4.1
NetR10_2: R10.2 U3.6 | length 204.7
  SignalTop w11.81: U3.6 1139.6,329.4 1199.43,269.57 1199.43,255.74 1205.33,249.84 R10.2
NetR11_2: R11.2 U3.7 | length 297.4
  SignalTop w11.81: U3.7 1207.91,349.09 1277.21,279.79 1277.21,252.5 1283.11,246.59 R11.2
NetR12_2: R12.2 U8.16 | length 98.9
  SignalTop w9.84: U8.16 1130.77,1267.77 1163.83,1300.83 1163.83,1314.52 1170.72,1321.41 R12.2
NetR14_1: R14.1 U12.31 | length 152.8
  SignalTop w11.81: R14.1 374,1021 426.98,1073.98 456.83,1073.98 U12.31
NetR15_1: R15.1 S13.3 | length 468.6
  SignalTop w11.81: R15.1 783.94,1563.41 887.53,1667 1061.36,1667 S13.3@1163.43,1564.94
NetU1_7: S5.2 U1.7 | length 443.4
  SignalTop w11.81: U1.7 1027.84,601.16 1028,601
  SignalTop w51.18: 1074,601 1222,601 S5.2
NetU3_5: D4.2 U3.5 | length 101.1
  SignalTop w11.81: U3.5 1052.89,309.72 1080.87,281.75 1080.87,281.59 D4.2
NetU7_2: J7.2 U12.29 | length 455.2
  SignalTop w11.81: J7.2 396.17,1493.17 396.17,1475.77 374,1453.61 374,1146.42 380.92,1139.5 U12.29
NetU7_3: J7.3 U12.30 | length 511.4
  SignalTop w11.81: J7.3 351,1454 351,1124 366.99,1108.01 U12.30
NetU8_1: U8.1 U12.27 | length 575.6
  SignalTop w11.81: U12.27 610.5,1202.5 v1(634,1226) ; v1(867,1274) 892,1274 935.63,1230.37 U8.1
  SingalBottom w11.81: v1(634,1226) 806,1226 851.36,1271.36 864.36,1271.36 v1(867,1274)
NetU8_3: U8.3 U12.11 | length 286.7
  SignalTop w11.81: U12.11 840.26,1108.01 846.27,1102 v1(850,1102) ; v1(889,1208) 892.73,1208 909.73,1191 U8.3
  SingalBottom w11.81: v1(850,1102) 849,1103 849,1168 v1(889,1208)
NetU8_4: U8.4 U12.13 | length 193.4
  SignalTop w11.81: U12.13 794.16,1171.16 987.07,1171.16 U8.4
NetU8_5: U8.5 U12.12 | length 198.3
  SignalTop w11.81: U12.12 882.5,1139.5 894.63,1151.63 U8.5
NetU8_6: U8.6 U12.28 | length 667.1
  SignalTop w11.81: U12.28 463.29,1167.06 486.94,1167.06 508,1146 v1(639,1146) ; v1(919,1091) 943.11,1115.11 U8.6@1023.65,1115.11
  SingalBottom w11.81: v1(639,1146) 640.5,1146 665.5,1171 692,1171 819,1044 872,1044 v1(919,1091)
NetU10_2: J10.2 U12.8 | length 681.1
  SignalTop w11.81: U12.8 763.78,987.93 784.71,967 v1(786,967)
  SingalBottom w11.81: J10.2 338,676 477,815 644,815 783.36,954.36 783.36,964.36 v1(786,967)
NetU10_3: J10.3 U12.9 | length 808.7
  SignalTop w11.81: U12.9 807.76,1045.02 811.7,1041.08 811.7,918.43 809,915.73 v1(809,912)
  SingalBottom w11.81: J10.3 328,576 408,656 519,656 772.58,909.58 806.58,909.58 v1(809,912)
NetU12_6: J15.2 U12.6 | length 722.1
  SignalTop w11.81: v1(670,918) 671.96,919.96 671.96,985.97 U12.6
  SingalBottom w11.81: J15.2 129,687.08 141.37,699.45 141.37,702.37 253,814 271.44,814 272.73,815.28 305.27,815.28 306.56,814 405,814 509,918 v1(670,918)
NetU12_7: J15.3 U12.7 | length 960.8
  SignalTop w11.81: U12.7 706.14,987.21 706.14,920.86 v1(773,854)
  SingalBottom w11.81: J15.3 177,528 434,528 757.36,851.36 770.36,851.36 v1(773,854)
NetU12_19: S13.1 U12.19 | length 413.4
  SignalTop w11.81: U12.19 677.86,1326.51 677.86,1359.86 v1(779,1461)
  SingalBottom w11.81: v1@779,1461.81 v1(779,1461) 862.64,1461 S13.1@966.57,1564.94
NetU12_23: J17.2 U12.23 | length 381.6
  SignalTop w11.81: U12.23 547.94,1404.94 604,1461 J17.2
NetU12_24: J17.4 U12.24 | length 411.3
  SignalTop w11.81: J17.4 504,1631 574,1561 574,1471 516.44,1413.44 U12.24
SHIELD: C3.1 J1.SHIELD R3.2 | length 294.4
  SignalTop w19.68: R3.2 C3.1 736.59,433.41 737,433 v1(742,433)
  SingalBottom w19.68: v1(742,433) 771.94,403.06 J1.SHIELD@771.94,287.14
pads on no net: J17.6 J17.7 J17.8 S5.3 S13.2 S13.4 U2.5 U8.2 U14.1

## Polygon pours and split planes (outlines as drawn)
NetU1_7 on SignalTop "NETU1_7_L01_P018" (solid, remove dead copper, pour order 18): 1006,596.04 1006,605.96 1029.97,607.74 1069,624 1069,578 1029.97,594.26
NetD2_1 on SignalTop "NETD2_1_L01_P030" (solid, remove dead copper, pour order 30): 1079.39,694 1025,694 981,655.5 957,655.5 957,716 1079.39,716
5VBUS on SignalTop "5VBUS_L01_P017" (solid, remove dead copper, pour order 17): 932,607.32 932,595.32 898,595.32 869,590 869,613 898,607.32
NetD2_1 on SignalTop "NETD2_1_L01_P002" (solid, remove dead copper, pour order 2): 796,694 913,694 957,655.5 981,655.5 981,716 796,716
3V3BUS on Power "3V3BUS_L03_P025" (solid, remove dead copper, pour order 25): 69.02,533 83.35,1837 1120,1837 1120,1287 1111,1278 773,1278 773,533
5VBUS on Power "5VBUS_L03_P024" (solid, remove dead copper, pour order 24): 965,502 576.28,502 483,392.94 483,147 888.58,147 965,238.43
GND on SingalBottom "GND_L04_P027" (solid, remove dead copper, pour order 27): 0,2187 1695,2187 1695,0 0,-1.02
GND on Ground "GND_L02_P022" (solid, remove dead copper, pour order 22): 0,2187 1695,2187 1695,0 0,0

## Keep-outs
Keep-Out Layer:
  the board outline again, w9.84

## Other copper
SignalTop:
  rectangle net GND: 1306,851 1337,1072
  region net GND: 1306,882 1306,851 1629,851 1629,882
  rectangle net GND: 1598,1366 1629,1631
  rectangle net GND: 1306,1264 1337,1631
  region net GND: 1629,1600 1629,1631 1306,1631 1306,1600
  region net GND: 1629,1116 1598,1116 1598,851 1629,851
Ground:
  pour cut-out: 1128,1077 1143,1077 1143,1059 1128,1059
  pour cut-out: 1154,1077 1154,1037 1136,1037 1136,1077
  pour cut-out: 1136,1037 1172,1037 1172,1020 1136,1020
  pour cut-out: 1154,1004 1154,1020 1172,1020 1172,1004
  pour cut-out: 1157.5,1004 1242.5,1004 1242.5,1027 1157.5,1027
  pour cut-out: 1228,1027 1228,867.25 1251,867.25 1251,1027
  pour cut-out: 948,876.5 1251,876.5 1251,853.5 948,853.5
  pour cut-out: 971,1008.75 971,867.25 948,867.25 948,1008.75
  pour cut-out: 1050,986 957,986 957,1009 1050,1009
  pour cut-out: 1050,986 1050,1074 1032,1074 1032,1061 1032,986
  pour cut-out: 1056,1061.71 1056,1143.76 1077,1143.76 1077,1081
  pour cut-out: 1131,1145.24 1068.46,1145.24 1068.46,1132.47 1131,1132.47
  pour cut-out: 1131,1061 1131,1133 1110,1133 1110,1082

## Silkscreen, mask and mechanical layers (free items; w line width, h text height)
Top Solder:
  rectangle: 1306,1264 1337,1631
  region: 1629,1600 1629,1631 1306,1631 1306,1600
  rectangle: 1598,1366 1629,1631
  region: 1629,1116 1598,1116 1598,851 1629,851
  region: 1306,882 1306,851 1629,851 1629,882
  rectangle: 1306,851 1337,1072
  lines w9.84: 1320,1615 1321,1615 ; 1321,867 1323,867 ; 1321,868 1323,868 1322,867 ; 1612,867 1613,867 ; 1612,1615 1613,1615 ; 1321,1007 1323,1007 1321,1007